# Altium PCB YarnControl_Mainboard_v1.0.PcbDoc
Units mm, origin at the board's own origin, x right, y up, seen from the top; angles counter-clockwise.
Board outline 100 x 100 mm, 2 copper layers (Top Layer, Bottom Layer); 119 components, 102 nets, 458 pads, 345 vias.
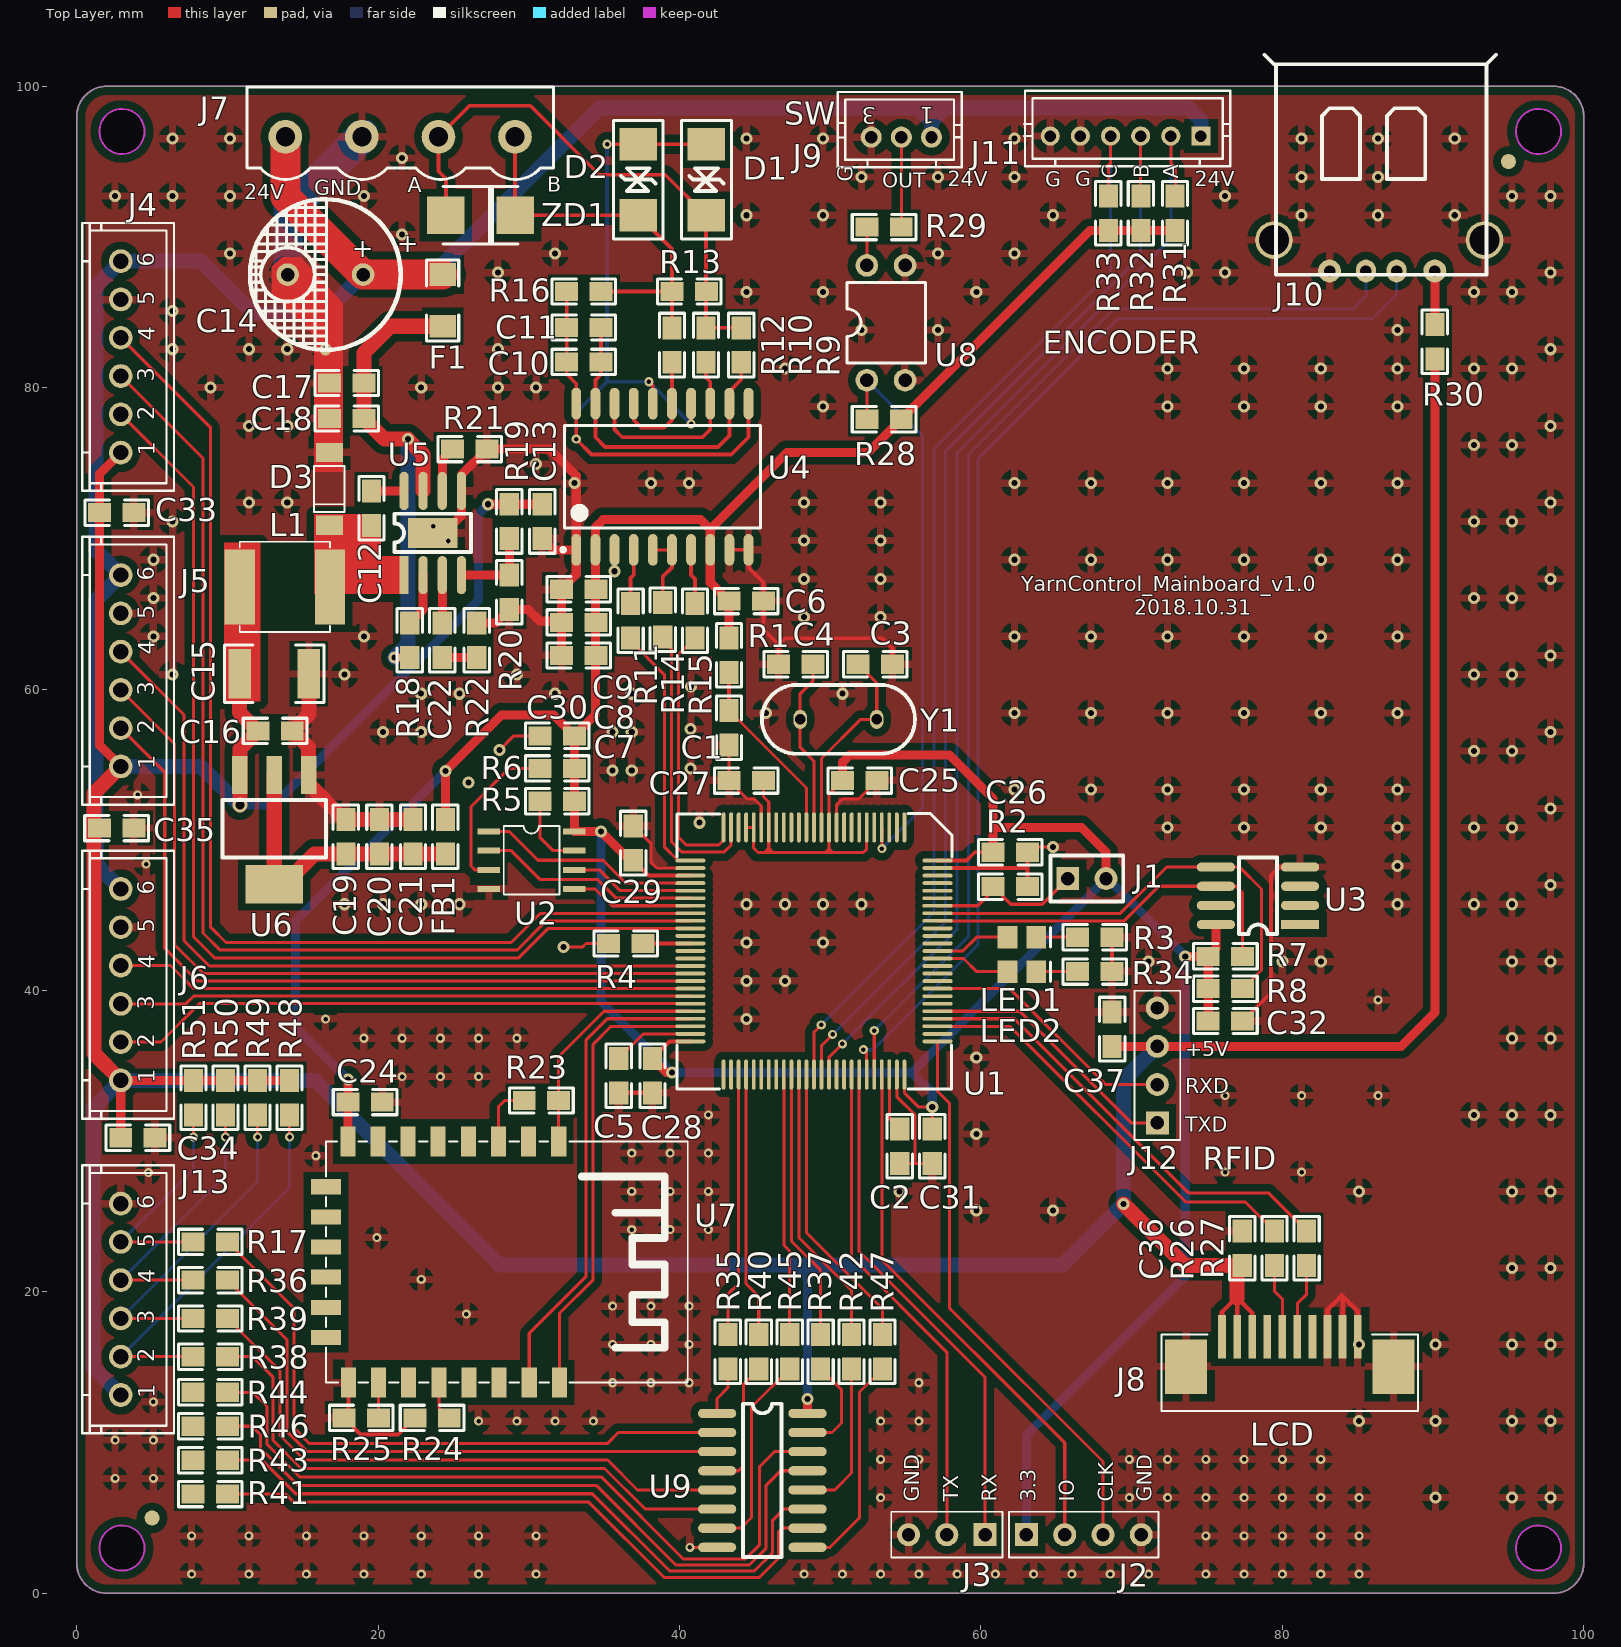
[diagram p0: Top Layer view]
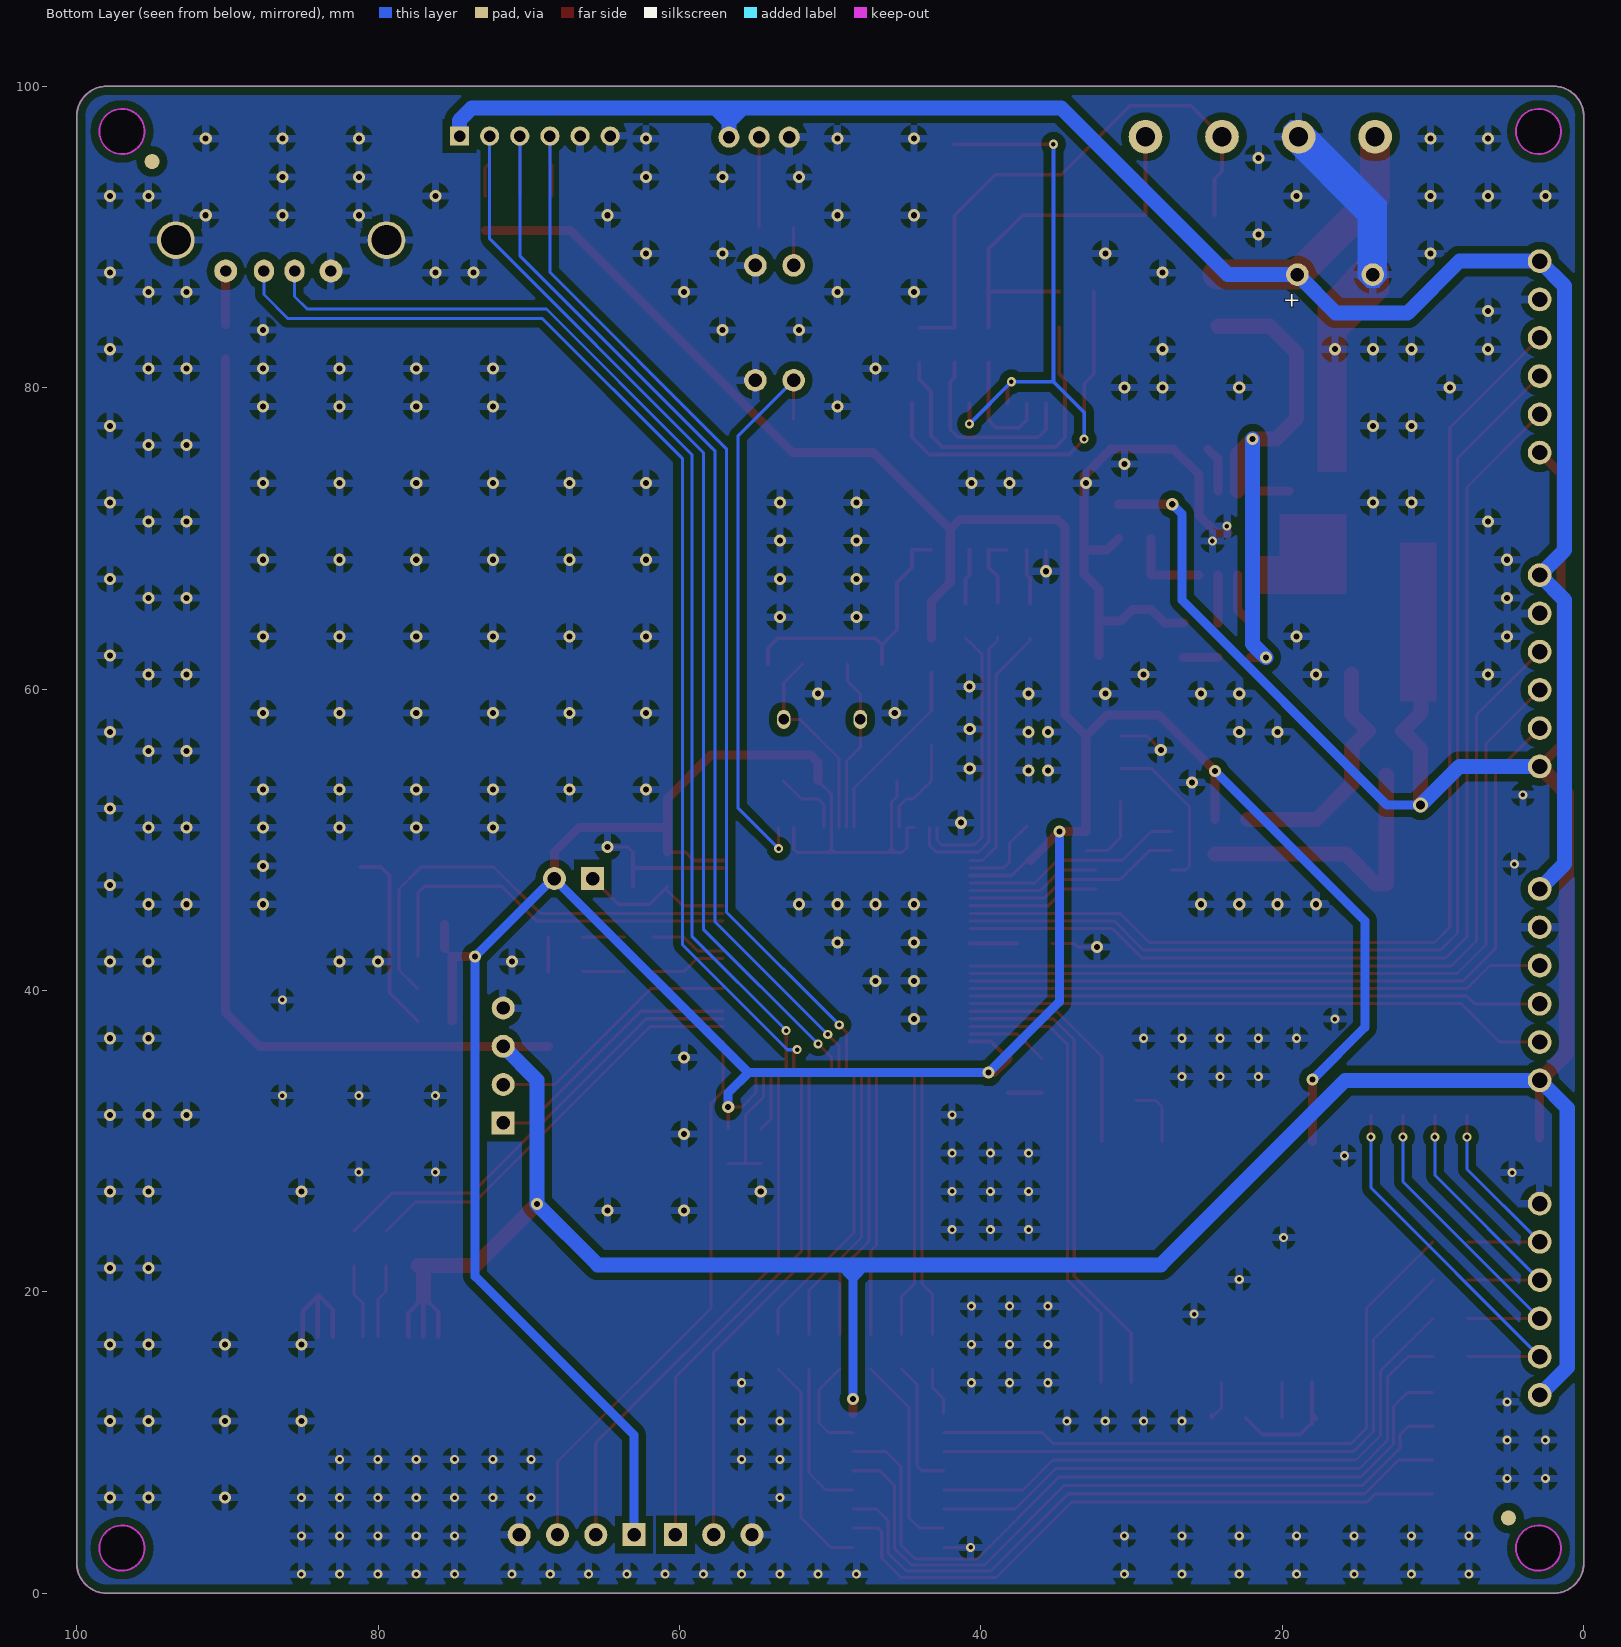
[diagram p1: Bottom Layer view, seen from below]

## Layer stack, top to bottom
Top Layer: signal copper 0.0356
Dielectric: dielectric 0.32, FR-4, Dk 4.8
Bottom Layer: signal copper 0.0356

## Board outline
0,2 0,98 cw(c2,98) 2,100 98,100 cw(c98,98) 100,98 100,2 cw(c98,2) 98,0 2,0 cw(c2,2)
cut-out: 3,1.5 cw(c3,3) 1.5,3 cw(c3,3) 3,4.5 cw(c3,3) 4.5,3 cw(c3,3)
cut-out: 95.5,3 ccw(c97,3) 97,1.5 ccw(c97,3) 98.5,3 ccw(c97,3) 97,4.5 ccw(c97,3)
cut-out: 97,95.5 cw(c97,97) 95.5,97 cw(c97,97) 97,98.5 cw(c97,97) 98.5,97 cw(c97,97)
cut-out: 3,95.5 cw(c3,97) 1.5,97 cw(c3,97) 3,98.5 cw(c3,97) 4.5,97 cw(c3,97)

## Design rules (kind name [scope] priority, off if disabled: settings)
Clearance Clearance_1 [inpoly] p1: gap=0.508
Clearance TQFP100 [(HasFootprint('TQFP100'))] p2: gap=0.178
Clearance [All] p3: gap=0.203
ComponentClearance [All] p1: gap=0 collisioncheckmode=3 verticalgap=0.254 showdistances=FALSE
HoleSize [All] p1: absolutevalues=TRUE maxlimit=4 minlimit=0.025 maxpercent=80.000 minpercent=20.000
MinimumSolderMaskSliver [All] p1: minsoldermaskwidth=0
PolygonConnect [All] p1: connectstyle=Relief reliefconductorwidth=0.508 reliefentries=4 polygonreliefangle="90 Angle"
RoutingVias [All] p1: holewidth=0.711 width=1.27 viastyle="Through Hole" minholewidth=0.3 minwidth=0.6 maxholewidth=0.711 maxwidth=1.27
SilkToSilkClearance [All] p1: silktosilkclearance=0
SilkscreenOverComponentPads [All] p1: minsilkscreentomaskgap=0
SolderMaskExpansion [All] p1: expansion=0.102
Width [All] p1: maxlimit=2 minlimit=0.203 preferedwidth=0.203
23 further rules are at their usual default settings.

## Classes and differential pairs
component class mainboard_interface.v1.0: J8 J9 J10 J11 J12 R26 R27 R28 R29 R30 R31 R32 R33 U8
component class mainboard_mcu.v1.0: C1 C2 C3 C4 C5 J1 J2 J3 LED1 LED2 R1 R2 R3 R4 R5 R6 R7 R8 R34 U1 U2 U3 Y1
component class mainboard_rs485.v1.0: C6 C7 C8 C9 C10 C11 C12 C13 C14 C15 C16 C17 C18 C19 C20 C21 C22 C25 C26 C27 C28 C29 C30 C31 C32 C33 C34 C35 C36 C37 D1 D2 D3 F1 FB1 J7 L1 R9 R10 R11 R12 R13 R14 R15 R16 R18 R19 R20 R21 R22 U4 U5 U6 ZD1
component class mainboard_wifi.v1.0: C24 R23 R24 R25 U7
component class mainboard_motor.v1.0: J4 J5 J6 J13 R17 R35 R36 R37 R38 R39 R40 R41 R42 R43 R44 R45 R46 R47 R48 R49 R50 R51 U9

## Components (designator, comment, footprint, x,y, rotation, side; value= is the part's Value field where it differs from the comment)
C1 "0.1uF" 0805#1 43.282,56.286 r90 top
C2 "2.2uF" 0805#1 54.61,28.524 r90 top
C3 "22p" 0805#1 51.841,61.646 r0 top
C4 "22p" 0805#1 48.844,61.646 r180 top
C5 "2.2uF" 0805#1 35.966,35.484 r270 top
C6 "106" 0805#1 45.568,65.837 r180 top
C7 "104" 0805#1 32.156,62.222 r0 top
C8 "104" 0805#1 32.156,64.423 r0 top
C9 "103" 0805#1 32.156,66.624 r0 top
C10 "106" 0805#1 32.512,81.712 r0 top
C11 "104" 0805#1 32.512,83.998 r0 top
C12 "0.1uF" 0805#1 19.558,73.152 r270 top
C13 "22uF" 0805#1 30.886,69.977 r90 top
C14 "220uF" CAP-5mm 18.999,87.503 r180 top
C15 "47uF" 1812 13.106,61.011 r180 top
C16 "0.1uF" 0805#1 14.3,57.226 r180 top
C17 "10uF" 0805#1 19.05,80.315 r180 top
C18 "0.1uF" 0805#1 19.05,77.953 r180 top
C19 "10uF" 0805#1 17.856,51.333 r270 top
C20 "0.1uF" 0805#1 20.083,51.333 r270 top
C21 "0.1uF" 0805#1 22.31,51.333 r270 top
C22 "150pF" 0805#1 24.257,64.389 r270 top
C24 "0.1uF" 0805#1 20.273,32.592 r180 top
C25 "0.1uF" 0805#1 53.111,53.924 r180 top
C26 "0.1uF" 0805#1 63.094,49.174 r180 top
C27 "0.1uF" 0805#1 43.282,53.924 r0 top
C28 "0.1uF" 0805#1 38.202,33.198 r90 top
C29 "0.1uF" 0805#1 36.932,50.927 r270 top
C30 "0.1uF" 0805#1 30.734,56.896 r0 top
C31 "0.1uF" 0805#1 56.769,28.524 r90 top
C32 "0.1uF" 0805#1 77.368,37.973 r180 top
C33 "0.1uF" 0805#1 3.81,71.704 r180 top
C34 "0.1uF" 0805#1 5.207,30.226 r180 top
C35 "0.1uF" 0805#1 3.785,50.775 r180 top
C36 "0.1uF" 0805#1 77.343,24.028 r270 top
C37 "0.1uF" 0805#1 68.707,38.583 r270 top
D1 "TVS" SMBJ_DO-214 41.783,93.802 r270 top
D2 "TVS" SMBJ_DO-214 37.262,93.802 r270 top
D3 "1N5819" Diode_TP2 16.764,75.692 r270 top
F1 "FUSE" 1206 24.282,87.503 r270 top
FB1 "FERRITE" 0805#1 24.46,49.047 r90 top
J1 "Jumper" J254-2 65.761,47.422 r0 top
J2 "SH-4" J254-4 63.017,3.886 r0 top
J3 "SH-3" J2.54-3 57.734,3.886 r180 top
J4 "STEP MOTOR1" XH2.54-6T 2.921,75.692 r90 top
J5 "STEP MOTOR2" XH2.54-6T 2.921,54.864 r90 top
J6 "STEP MOTOR3" XH2.54-6T 2.921,34.036 r90 top
J7 "SH-4" J5.08_4(NoEar) 21.463,96.647 r180 top
J8 "SDWe050C17" FCC1.0-10 80.493,16.027 r90 top
J9 "SH-3" PH2.0-3T 56.718,96.622 r180 top
J10 "USB" USB_FEMALE_A 86.36,94.996 r90 top
J11 "J-6" PH2.0-6P 74.6,96.698 r180 top
J12 "RFID" J254-4 71.704,31.217 r90 top
J13 "SERVO MOTOR" XH2.54-6T 2.921,13.157 r90 top
L1 "4.7uH" Inductance6*6 13.818,66.777 r180 top
LED1 "GREEN" LED 62.713,43.536 r0 top
LED2 "GREEN" LED 62.713,41.25 r0 top
R1 "10K" 0805#1 43.282,61.112 r90 top
R2 "10K" 0805#1 60.808,46.888 r0 top
R3 "1K" 0805#1 66.421,43.536 r0 top
R4 "10K" 0805#1 37.567,43.121 r180 top
R5 "10K" 0805#1 33.02,52.553 r180 top
R6 "10K" 0805#1 30.734,54.737 r0 top
R7 "22R" 0805#1 77.368,42.266 r180 top
R8 "22R" 0805#1 77.368,40.119 r180 top
R9 "47K" 0805#1 44.094,83.972 r270 top
R10 "101" 0805#1 41.758,81.686 r90 top
R11 "220" 0805#1 36.754,63.398 r90 top
R12 "101" 0805#1 39.497,81.686 r90 top
R13 "120R" 0805#1 39.497,86.385 r0 top
R14 "220" 0805#1 38.887,63.449 r90 top
R15 "220" 0805#1 41.021,63.398 r90 top
R16 "47K" 0805#1 32.512,86.385 r0 top
R17 "100R" 0805#2 8.865,23.317 r180 top
R18 "100K" 0805#1 22.098,64.389 r270 top
R19 "210K" 0805#1 28.702,72.263 r270 top
R20 "40.2K" 0805#1 28.702,65.278 r90 top
R21 "100K" 0805#1 27.229,75.921 r180 top
R22 "100K" 0805#1 26.543,64.389 r270 top
R23 "1K" 0805#1 31.982,32.694 r180 top
R24 "1K/NC" 0805#1 24.718,11.637 r180 top
R25 "1K" 0805#1 20.019,11.637 r180 top
R26 "220" 0805#1 79.477,21.742 r90 top
R27 "220" 0805#1 81.61,21.742 r90 top
R28 "10K" 0805#1 54.712,77.902 r180 top
R29 "1K" 0805#1 52.426,90.653 r0 top
R30 "0R" 0805#1 90.119,81.915 r90 top
R31 "10K" 0805#1 72.873,90.424 r90 top
R32 "10K" 0805#1 70.612,90.424 r90 top
R33 "10K" 0805#1 68.453,90.424 r90 top
R34 "1K" 0805#1 66.421,41.25 r0 top
R35 "100R" 0805#2 43.205,16.027 r90 top
R36 "100R" 0805#2 8.865,20.777 r180 top
R37 "100R" 0805#2 49.362,16.027 r270 top
R38 "100R" 0805#2 8.865,15.697 r180 top
R39 "100R" 0805#2 8.865,18.237 r180 top
R40 "100R" 0805#2 45.258,16.027 r90 top
R41 "100R" 0805#2 8.865,6.579 r180 top
R42 "100R" 0805#2 51.415,16.027 r270 top
R43 "100R" 0805#2 8.865,8.831 r180 top
R44 "100R" 0805#2 8.865,13.335 r180 top
R45 "100R" 0805#2 47.31,16.027 r90 top
R46 "100R" 0805#2 8.865,11.083 r180 top
R47 "100R" 0805#2 53.467,16.027 r270 top
R48 "10K" 0805#1 14.122,34.036 r270 top
R49 "10K" 0805#1 11.997,34.036 r270 top
R50 "10K" 0805#1 9.872,34.036 r270 top
R51 "10K" 0805#1 7.747,34.036 r270 top
U1 "STM32F40x" TQFP100 48.92,42.621 r270 top locked
U2 "W25X16" SOP8 30.175,48.641 r0 top
U3 "SMEC98SP" SO-8 78.384,46.279 r180 top
U4 "ADM2587E" SOIC_W_20 38.227,77.394 r90 top
U5 "MP1584" MP1584 23.622,70.358 r90 top
U6 "AMS1117" TO-223 13.106,50.673 r180 top
U7 "ESP-12F" ESP-12F 24.286,21.975 r270 top
U8 "TLP521-1" DIP-4 52.426,88.113 r90 top
U9 "AM26LS31" SO-16 42.494,11.938 r0 top
Y1 "8M" XTAL 48.006,57.988 r0 top
ZD1 "SMBJ15CA" DO-214AA/SMB 26.797,91.44 r0 top

## Footprints (in the part's own frame and the unit in brackets; to place one, negate y for a bottom-side part, rotate by r counter-clockwise, add the part's x,y. Pads: shape width x height; smd on the part's side, far side on the other; paste and mask are expansions set on the pad)
0805#1 [mil]
  rect 60x50 smd: 1(0,0) 2(90,0)
  silkscreen extent -38,-33 128,33
0805#2 [mil]
  rect 60x50 smd: 1(-45,0) 2(45,0)
  silkscreen extent -83,-33 83,33, body extent -39,-25 39,24, height 18
1206 [mil]
  rect 60x70 smd: 1(0,0) 2(135,0)
  silkscreen extent -38,-42 173,42
1812 [mm]
  rect 1.5x3.3 smd: 1(-2.3,0) 2(2.3,0)
  silkscreen extent -3.3,-1.91 3.3,1.91
CAP-5mm [mm]
  round 1.5 hole 0.9: 1(0,0) 2(5,0)
  silkscreen extent -2.5,-5 7.5,5
Diode_TP2 [mil]
  rect 50x70 smd: 1(0,0) 2(190,0)
  silkscreen extent 35,-40 155,40
DIP-4 [mm]
  round 1.5 hole 0.9: 1(0,0) 2(0,-2.54) 3(-7.62,-2.54) 4(-7.62,0)
  silkscreen extent -6.48,-3.9 -1.14,1.3
DO-214AA/SMB [mm]
  rect 2.5x2.5 smd: 1(-2.3,0) 2(2.3,0)
  silkscreen extent -2.5,-1.9 2.5,1.9
ESP-12F [mm]
  rect 2x1 smd: 1(-8,7.7) 2(-8,5.7) 3(-8,3.7) 4(-8,1.7) 5(-8,-0.3) 6(-8,-2.3) 7(-8,-4.3) 8(-8,-6.3) 15(8,-6.26) 16(8,-4.26) 17(8,-2.26) 18(8,-0.26) 19(8,1.74) 20(8,3.74) 21(8,5.74) 22(8,7.74)
  rect 1x2 smd: 9(-5,-7.74) 10(-3,-7.74) 11(-1,-7.74) 12(1,-7.74) 13(3,-7.74) 14(5,-7.74)
  silkscreen extent -8,-7.74 8,16.26
FCC1.0-10 [mil]
  rect 114x20 smd: 1(39,177) 2(39,137.63) 3(39,98.26) 4(39,58.89) 5(39,19.52) 6(39,-19.85) 7(39,-59.22) 8(39,-98.59) 9(39,-137.96) 10(39,-177.33)
  rect 142x110 smd: 11(-39,271) 12(-39,-271)
  silkscreen extent -155,-335 45,335
Inductance6*6 [mm]
  rect 2x5 smd: 1(-3,0) 2(3,0)
  silkscreen extent -3,-3 3,3
J2.54-3 [mil]
  rect 60x60 hole 35: 1(-100,0)
  round 60 hole 35: 2(0,0) 3(100,0)
  silkscreen extent -145,-60 145,60
J5.08_4(NoEar) [mil]
  round 88 hole 50: 1(300,0) 2(100,0) 3(-100,0) 4(-300,0)
  silkscreen extent -400,-130 400,111
J254-2 [mil]
  rect 60x60 hole 35: 1(0,0)
  round 60 hole 35: 2(100,0)
  silkscreen extent -45,-60 145,60
J254-4 [mil]
  rect 60x60 hole 35: 1(0,0)
  round 60 hole 35: 2(100,0) 3(200,0) 4(300,0)
  silkscreen extent -45,-60 345,60
LED [mm]
  rect 1.3x1.5 smd: 1(-0.95,0) 2(0.95,0)
  silkscreen extent 1.9,-0.65 1.9,0.65
MP1584 [mil]
  rect 78.74x129.92 smd: 0(0,0)
  rect 100x24 smd: 1(-110,75)
  oval 100x24 smd: 2(-110,25) 3(-110,-25) 4(-110,-75) 5(110,-75) 6(110,-25) 7(110,25) 8(110,75)
  silkscreen extent -50,-100 50,100
PH2.0-3T [mil]
  round 55 hole 32: 1(0,0)
  round 55 hole 32.01: 2(78.74,0) 3(157.48,0)
  silkscreen extent -79,-118 245,79
PH2.0-6P [mil]
  rect 50x50 hole 30: 1(0,0)
  round 50 hole 30: 2(78.74,0) 3(157.48,0) 4(236.22,0) 5(314.96,0) 6(393.7,0)
  silkscreen extent -77,-118 462,79
SMBJ_DO-214 [mm]
  rect 2.16x2.5 smd: 1(-2.35,0) 2(2.35,0)
  silkscreen extent -3.94,-1.65 3.94,1.65, body extent -2.8,-1.95 2.8,1.95, height 2.5
SO-8 [mil]
  rect 100x24 smd: 1(-110,75)
  oval 100x24 smd: 2(-110,25) 3(-110,-25) 4(-110,-75) 5(110,-75) 6(110,-25) 7(110,25) 8(110,75)
  silkscreen extent -50,-100 50,100
SO-16 [mil]
  oval 100x24 smd: 1(0,0) 2(0,-50) 3(0,-100) 4(0,-150) 5(0,-200) 6(0,-250) 7(0,-300) 8(0,-350) 9(236,-350) 10(236,-300) 11(236,-250) 12(236,-200) 13(236,-150) 14(236,-100) 15(236,-50) 16(236,0)
  silkscreen extent 68,-375 168,25
SOIC_W_20 [mm]
  oval 2.1x0.65 smd: 1(-8.152,5.08) 2(-8.152,3.81) 3(-8.152,2.54) 4(-8.152,1.27) 5(-8.152,0) 6(-8.152,-1.27) 7(-8.152,-2.54) 8(-8.152,-3.81) 9(-8.152,-5.08) 10(-8.152,-6.35) 11(1.548,-6.35) 12(1.548,-5.08) 13(1.548,-3.81) 14(1.548,-2.54) 15(1.548,-1.27) 16(1.548,0) 17(1.548,1.27) 18(1.548,2.54) 19(1.548,3.81) 20(1.548,5.08)
  silkscreen extent -8.28,-7.13 0.1,6.08, body extent -8.46,-7.13 1.86,5.86, height 2.5
SOP8 [mm]
  rect 1.5x0.4 smd: 1(-2.829,1.905) 2(-2.829,0.635) 3(-2.829,-0.635) 4(-2.829,-1.905) 5(2.829,-1.905) 6(2.829,-0.635) 7(2.829,0.635) 8(2.829,1.905)
  silkscreen extent -1.84,-2.29 1.87,2.29
TO-223 [mil]
  rect 150x100 smd: 0(0,142.5)
  rect 40x100 smd: 1(-90,-142.5) 2(0,-142.5) 3(90,-142.5)
  silkscreen extent -135,-78 135,73
TQFP100 [mm]
  round 1 on Top Overlay: 0(-7.62,7.62)
  oval 2x0.254 smd: 1(-8.2,6) 2(-8.2,5.5) 3(-8.2,5) 4(-8.2,4.5) 5(-8.2,4) 6(-8.2,3.5) 7(-8.2,3) 8(-8.2,2.5) 9(-8.2,2) 10(-8.2,1.5) 11(-8.2,1) 12(-8.2,0.5) 13(-8.2,0) 14(-8.2,-0.5) 15(-8.2,-1) 16(-8.2,-1.5) 17(-8.2,-2) 18(-8.2,-2.5) 19(-8.2,-3) 20(-8.2,-3.5) 21(-8.2,-4) 22(-8.2,-4.5) 23(-8.2,-5) 24(-8.2,-5.5) 25(-8.2,-6) 51(8.2,-6) 52(8.2,-5.5) 53(8.2,-5) 54(8.2,-4.5) 55(8.2,-4) 56(8.2,-3.5) 57(8.2,-3) 58(8.2,-2.5) 59(8.2,-2) 60(8.2,-1.5) 61(8.2,-1) 62(8.2,-0.5) 63(8.2,0) 64(8.2,0.5) 65(8.2,1) 66(8.2,1.5) 67(8.2,2) 68(8.2,2.5) 69(8.2,3) 70(8.2,3.5) 71(8.2,4) 72(8.2,4.5) 73(8.2,5) 74(8.2,5.5) 75(8.2,6)
  oval 0.254x2 smd: 26(-6,-8.2) 27(-5.5,-8.2) 28(-5,-8.2) 29(-4.5,-8.2) 30(-4,-8.2) 31(-3.5,-8.2) 32(-3,-8.2) 33(-2.5,-8.2) 34(-2,-8.2) 35(-1.5,-8.2) 36(-1,-8.2) 37(-0.5,-8.2) 38(0,-8.2) 39(0.5,-8.2) 40(1,-8.2) 41(1.5,-8.2) 42(2,-8.2) 43(2.5,-8.2) 44(3,-8.2) 45(3.5,-8.2) 46(4,-8.2) 47(4.5,-8.2) 48(5,-8.2) 49(5.5,-8.2) 50(6,-8.2) 76(6,8.2) 77(5.5,8.2) 78(5,8.2) 79(4.5,8.2) 80(4,8.2) 81(3.5,8.2) 82(3,8.2) 83(2.5,8.2) 84(2,8.2) 85(1.5,8.2) 86(1,8.2) 87(0.5,8.2) 88(0,8.2) 89(-0.5,8.2) 90(-1,8.2) 91(-1.5,8.2) 92(-2,8.2) 93(-2.5,8.2) 94(-3,8.2) 95(-3.5,8.2) 96(-4,8.2) 97(-4.5,8.2) 98(-5,8.2) 99(-5.5,8.2) 100(-6,8.2)
  silkscreen extent -9.12,-9.1 9.17,9.14
USB_FEMALE_A [mil]
  round 60 hole 30: 1(-285.63,-147.91) 4(-285.63,127.09)
  oval 60x52.13 hole 30: 2(-285.63,-47.91) 3(-285.63,32.09)
  round 98.43 hole 78.74: 5(-205,272.09) 6(-205,-277.91)
  silkscreen extent -296,-308 279,297
XH2.54-6T [mil]
  round 62 hole 40: 1(0,0) 2(100,0) 3(200,0) 4(300,0) 5(400,0) 6(500,0)
  silkscreen extent -100,-139 600,101
XTAL [mil]
  oval 35x50 hole 28: 1(0,0) 2(200,0)
  silkscreen extent -100,-90 300,90

## Part data
C1 C2 C3 C4 C5 C6 C7 C8 C9 C10 C11 C24: library part Cap, "Capacitor"
C12 C13 C17 C18 C22: library part CAP, "电容"
C14: library part "Cap Pol1", "电解电容"
C15 C16 C19 C20 C21 C25 C26 C27 C28 C29 C30 C31 C32 C33 C34 C35 C36 C37: library part Cap0805
D3: library part Diode, "二极管"
F1: "保险丝"
J4 J5 J6 J11 J13: library part SH-6
J8: library part SH-12
J12: library part SH-4
L1: library part Inductor, "电感"
LED1 LED2: library part LED2, "Typical RED, GREEN, YELLOW, AMBER GaAs LED"
R1 R4 R5 R6 R7 R8 R9 R10 R11 R12 R13 R14 R15 R16 R17 R23 R24 R25 R26 R27 R28 R29 R30 R31 R32 R33 R35 R36 R37 R38 R39 R40 R41 R42 R43 R44 R45 R46 R47 R48 R49 R50 R51: library part Res2, "Resistor"
R2 R3 R18 R19 R20 R21 R22 R34: library part RES, "电阻"
U4: "isolated DC-DC RS485"
Y1: library part X-32.768, "Crystal Oscillator"
ZD1: library part TVS, "瞬态抑制二极管"

## Free pads (board coordinates)
  round 1 smd: 0(5,5) 0(95,95)
  round 1 smd far side: 0(5,5) 0(95,95)

## Via types
v1: diameter 0.8, hole 0.4, Top Layer to Bottom Layer, 224 vias
v2: diameter 0.6, hole 0.3, Top Layer to Bottom Layer, 120 vias
v3: diameter 1, hole 0.6, Top Layer to Bottom Layer, 1 vias

## Nets (pads, with @x,y where several pads share a name; then routed paths per layer and width w, separated by ;. In a path a pad name is that pad's centre, name@x,y a point inside that pad or via, vN(x,y) a via of type N, cw(c..) or ccw(c..) an arc to the next point about the centre after c; other vN are vias at no path point)
485_DE: R14.1 U1.24 | length 19.4
  Top Layer w0.203: R14.1 38.887,63.221 39.472,62.636 39.472,49.86 40.132,49.2 42.977,49.2 43.42,49.643 U1.24
485_RX: R11.1 U1.26 | length 16.9
  Top Layer w0.203: R11.1 36.754,63.195 38.989,60.96 38.989,49.53 39.898,48.621 U1.26
485_TX: R15.1 U1.25 | length 17.9
  Top Layer w0.203: R15.1 39.929,62.306 39.929,50.165 40.437,49.657 42.596,49.657 42.92,49.982 U1.25
+3.3V: C6.2 C7.2 C8.2 C9.2 C24.2 C25.2 C26.2 C27.2 C28.2 C29.2 C30.2 C31.2 C32.2 FB1.2 J1.2 J2.1 R1.2 R5.1 R6.2 R7.2 R8.2 R28.1 R31.1 R32.1 R33.1 U1.6 U1.11 U1.19 U1.21 U1.22 U1.28 U1.50 U1.75 U1.100 U2.8 U3.8 U4.2 U4.8 U7.8 | length 304.5
  Top Layer w0.203: U1.22 U1.21 44.92,49.441 45.212,49.149 45.644,49.149 ; C27.2 45.568,52.857 45.92,52.505 U1.19 45.92,49.428 ; C25.2 49.92,53.019 U1.11 49.92,49.403 ; U1.6 52.42,49.372 52.197,49.149 50.174,49.149 ; U1.75@54.92,33.599 U1.75 54.92,33.218 55.88,32.258 v1(56.769,32.258) C31.2 ; 45.644,49.149 45.923,49.149 ; 45.644,49.149 45.644,49.152 45.92,49.428 ; 45.92,49.428 45.92,49.152 45.923,49.149 ; 45.92,49.428 46.2,49.149 ; 45.923,49.149 46.2,49.149 ; 46.2,49.149 49.666,49.149 ; 49.666,49.149 49.936,49.149 ; 49.666,49.149 49.92,49.403 ; 49.92,49.403 49.92,49.165 49.936,49.149 ; 49.92,49.403 50.174,49.149 ; 49.936,49.149 50.174,49.149
  Top Layer w0.254: C29.2 37.951,47.621 U1.28 ; C28.2 39.339,36.621 U1.50 ; U1.100 59.035,48.621 59.588,49.174 C26.2 ; R7.2 R7.2@75.59,42.774
  Top Layer w0.6: U7.8@17.987,29.976 C24.2 v1(17.987,34.091) ; FB1.2 v1(24.46,54.559) 28.194,58.293 31.623,58.293 C30.2 ; C29.2@36.703,48.641 v1(34.798,50.546) 33.036,50.546 33.02,50.562 R5.1 R6.2 C30.2 ; C28.2 39.141,34.544 v1(39.497,34.544) ; R1.2 C6.2 42.037,67.081 U4.8 42.037,70.612 ; C25.2 50.825,55.143 51.308,55.626 57.912,55.626 60.808,52.73 60.808,50.8 ; C26.2 60.808,50.8 ; J1.2 68.301,49.174 66.675,50.8 60.808,50.8 ; R31.1 R32.1 R33.1 67.234,90.424 R28.1 52.502,75.692 47.117,75.692 42.037,70.612 ; v1(73.558,42.266) R7.2 R8.2 C32.2 ; R7.2@75.59,42.774 U3.8 ; C30.2 34.417,58.293 U4.2 34.417,70.739 34.925,71.247 41.402,71.247 42.037,70.612
  Bottom Layer w0.6: v1(17.987,34.091) 14.519,37.559 14.519,44.618 v1(24.46,54.559) ; v1(34.798,50.546) 34.798,39.243 v1(39.497,34.544) 55.423,34.544 ; v1(56.769,32.258) 56.769,33.198 55.423,34.544 ; J2.1 63.017,10.49 73.558,21.031 v1(73.558,42.266) J1.2@68.402,47.422 ; J1.2 55.423,34.544
+5V: C13.2 C15.2 C16.2 C33.2 C34.2 C35.2 C36.2 C37.2 J4.1 J5.1 J6.1 J8.1 J8.2 J8.3 J12.3 J13.1 L1.2 R19.1 R30.1 R48.1 R49.1 R50.1 R51.1 U6.3 U9.16 | length 321
  Top Layer w0.254: C15.2@10.818,61.011 L1.2
  Top Layer w0.3: J8.1 75.997,18.669 76.962,19.634 ; J8.2 76.997,19.599 77.997,18.599 J8.3
  Top Layer w0.6: C34.2 J6.1 R48.1 ; J5.1 1.524,56.261 C33.2 1.524,74.295 J4.1 ; v1(27.305,72.263) R19.1 C13.2 ; U9.16 v1(48.489,12.878) ; C37.2 J12.3 87.884,36.297 90.119,38.532 R30.1
  Top Layer w1: J6.1 1.143,35.814 1.143,53.086 J5.1 ; C15.2 10.806,58.434 C16.2 10.82,56.032 U6.3 v3(10.82,52.299) ; v1(69.469,25.832) 73.558,21.742 C36.2 76.997,21.396 76.997,19.599
  Bottom Layer w0.6: v3(10.82,52.299) 13.056,52.299 26.67,65.913 26.67,71.628 v1(27.305,72.263) ; 47.6,21.793 48.489,20.904 ; v1(48.489,12.878) 48.489,20.904 ; 48.489,21.793 48.489,20.904 ; 49.378,21.793 48.489,20.904
  Bottom Layer w1: J13.1 1.092,14.986 1.092,32.207 J6.1 15.824,34.036 28.067,21.793 47.6,21.793 48.489,21.793 49.378,21.793 65.43,21.793 v1(69.469,25.832) 69.469,34.061 J12.3 ; J5.1 8.255,54.864 v3(10.82,52.299)
+24V: C14.1 F1.1 J4.6 J5.6 J6.6 J7.1 J9.1 J11.1 | length 145.6
  Top Layer w2: J7.1 13.843,92.659 C14.1 F1.1
  Bottom Layer w1: J6.6 1.27,48.387 1.27,65.913 J5.6 1.27,69.215 1.27,86.741 J4.6 8.255,88.392 11.684,84.963 16.459,84.963 C14.1 23.622,87.503 34.671,98.552 55.829,98.552 ; J9.1 56.718,97.663 ; J11.1 74.6,97.739 73.787,98.552 57.607,98.552 ; 55.829,98.552 56.896,98.552 ; 55.829,98.552 56.718,97.663 ; 56.718,97.663 56.718,98.374 56.896,98.552 ; 56.718,97.663 57.607,98.552 ; 56.896,98.552 57.607,98.552
BOOT0: J1.1 R2.1 U1.94 | length 10.2
  Top Layer w0.203: U1.94 59.794,45.621 R2.1@60.808,46.634 ; R2.1 61.976,45.72 64.059,45.72 J1.1
BOOT1: R4.1 U1.37 | length 3.2
  Top Layer w0.254: R4.1 U1.37
CLOSE_SW: R28.2 U1.4 U8.4 | length 37.8
  Top Layer w0.203: R28.2 U8.4 ; v2(53.42,49.407) U1.4
  Bottom Layer w0.203: U8.4 56.134,76.784 56.134,52.121 v2(53.42,49.407)
DIFF_G: R40.2 U1.54 | length 17.6
  Top Layer w0.203: U1.54 44.42,20.527 45.258,19.69 R40.2
DIFF_G\: R42.1 U1.61 | length 18.7
  Top Layer w0.203: U1.61 47.92,23.606 51.415,20.112 R42.1
DIFF_IN1: R35.2 U1.53 | length 17.5
  Top Layer w0.203: R35.2 43.205,19.837 43.92,20.552 U1.53
DIFF_IN2: R45.2 U1.59 | length 17.4
  Top Layer w0.203: U1.59 46.92,23.107 47.31,22.718 R45.2
DIFF_IN3: R47.1 U1.62 | length 19.3
  Top Layer w0.203: U1.62 48.42,23.919 53.467,18.872 R47.1
DIFF_IN4: R37.1 U1.60 | length 18.1
  Top Layer w0.203: U1.60 47.42,23.369 49.362,21.427 R37.1
DIFF_OUTPUT1+: R17.1 U9.2 | length 43
  Top Layer w0.203: R17.1 14.427,18.898 14.427,10.947 15.443,9.931 35.204,9.931 35.941,10.668 U9.2
DIFF_OUTPUT1-: R36.1 U9.3 | length 40.8
  Top Layer w0.203: R36.1 13.945,16.84 13.945,10.744 15.291,9.398 U9.3
DIFF_OUTPUT2+: R38.1 U9.6 | length 39.1
  Top Layer w0.203: R38.1 11.659,15.697 13.03,14.326 13.03,10.135 14.884,8.28 35.027,8.28 37.719,5.588 U9.6
DIFF_OUTPUT2-: R39.1 U9.5 | length 39.7
  Top Layer w0.203: R39.1 13.487,14.757 13.487,10.465 15.113,8.839 35.23,8.839 37.211,6.858 U9.5
DIFF_OUTPUT3+: R41.1 U9.10 | length 43.2
  Top Layer w0.203: R41.1 13.868,6.579 14.402,6.045 33.985,6.045 38.989,1.041 45.288,1.041 46.584,2.337 46.584,4.089 46.812,4.318 U9.10
DIFF_OUTPUT3-: R43.1 U9.11 | length 44.5
  Top Layer w0.203: R43.1 12.302,8.831 14.529,6.604 34.214,6.604 39.345,1.473 44.958,1.473 46.177,2.692 46.177,4.851 46.914,5.588 U9.11
DIFF_OUTPUT4+: R44.1 U9.14 | length 50.5
  Top Layer w0.203: R44.1 11.684,13.335 12.624,12.395 12.624,9.881 14.783,7.722 34.798,7.722 40.234,2.286 44.374,2.286 45.314,3.226 45.314,8.407 46.304,9.398 U9.14
DIFF_OUTPUT4-: R46.1 U9.13 | length 47.8
  Top Layer w0.203: R46.1 11.625,11.083 12.192,10.516 12.192,9.627 14.656,7.163 34.468,7.163 39.751,1.88 44.628,1.88 45.745,2.997 45.745,7.163 46.711,8.128 U9.13
ENCODER_A: J11.2 R31.2 U1.65 | length 75.8
  Top Layer w0.203: U1.65 49.92,35.569 v2(50.8,36.449) ; J11.2 72.6,94.913 72.898,94.615 72.898,92.735 R31.2
  Bottom Layer w0.203: v2(50.8,36.449) 58.42,44.069 58.42,75.692 72.6,89.872 J11.2
ENCODER_B: J11.3 R32.2 U1.64 | length 75
  Top Layer w0.203: U1.64 49.42,36.339 v2(50.165,37.084) ; J11.3 70.6,92.722 R32.2
  Bottom Layer w0.203: v2(50.165,37.084) 57.658,44.577 57.658,75.819 70.6,88.761 J11.3
ENCODER_C: J11.4 R33.2 U1.63 | length 74.5
  Top Layer w0.203: U1.63 48.92,37.236 v2(49.403,37.719) ; R33.2 68.453,94.742 68.6,94.889 J11.4
  Bottom Layer w0.203: v2(49.403,37.719) 56.896,45.212 56.896,75.946 68.6,87.65 J11.4
FLASH_SPI_MISO: U1.31 U2.2 | length 14.7
  Top Layer w0.203: U2.2 28.829,49.276 30.734,47.371 34.544,47.371 35.794,46.121 U1.31
FLASH_SPI_MOSI: U1.32 U2.5 | length 8.8
  Top Layer w0.203: U2.5@32.369,46.736 U2.5 34.417,46.736 35.532,45.621 U1.32
FLASH_SPI_NSS: U1.29 U2.1 | length 14.8
  Top Layer w0.203: U2.1 28.702,50.546 30.607,48.641 34.925,48.641 36.445,47.121 U1.29
FLASH_SPI_SCK: U1.30 U2.6 | length 8.9
  Top Layer w0.203: U2.6@32.369,48.006 U2.6 34.671,48.006 36.056,46.621 U1.30
GND: C1.1 C2.1 C3.2 C4.2 C5.2 C6.1 C7.1 C8.1 C9.1 C13.1 C14.2 C15.1 C16.1 C17.2 C18.2 C19.1 C20.1 C21.1 C24.1 C25.1 C26.1 C27.1 C28.1 C29.1 C30.1 C31.1 C32.1 C33.1 C34.1 C35.1 C36.1 C37.1 D3.1 J2.4 J3.3 J4.5 J5.5 J6.5 J7.2 J8.8 J8.9 J8.10 J8.11 J8.12 J9.3 J10.4 J10.5 J10.6 J11.5 J11.6 J12.4 J13.6 R2.2 R3.2 R4.2 R20.1 R21.1 R22.1 R24.2 R25.2 R34.2 U1.10 U1.20 U1.27 U1.74 U1.99 U2.4 U3.4 U4.1 U4.3 U4.9 U4.10 U5.0 U5.5 U6.1 U7.15 U8.2 U8.3 U9.8 | length 174.5
  Top Layer w0.203: v1(28.067,55.956) 29.007,56.896 C30.1 ; v1(32.309,42.875) 33.553,42.875 33.799,43.121 R4.2 ; v1(35.687,67.818) U4.3 ; C29.1 38.1,49.759 38.1,48.514 38.493,48.121 U1.27 ; v2(40.691,3.048) U9.8 ; C1.1 C27.1 44.501,52.705 44.958,52.705 45.42,52.243 U1.20 ; U1.10 50.42,52.325 50.8,52.705 51.892,52.705 C25.1 ; U1.74 54.42,32.956 55.626,31.75 55.626,28.524 ; C2.1 55.626,28.524 ; C31.1 55.626,28.524 ; C26.1 63.449,49.53 v1(64.77,49.53)
  Top Layer w0.254: C14.2 16.764,84.738 C17.2 C18.2 D3.1 ; R25.2@18.026,11.219 R25.2@18.026,11.344 ; U7.15 R25.2@18.026,11.93 ; C21.1 C21.1@22.377,51.333 ; R24.2 21.336,10.541 18.829,10.541 R25.2@18.026,11.344 ; U4.9 U4.10 44.577,68.072 45.568,67.081 C6.1 45.568,63.932 46.558,62.941 ; C4.2 46.558,62.941 ; C3.2 54.127,62.713 53.467,63.373 46.99,63.373 46.558,62.941 ; U1.99 63.094,48.121 ; R2.2 63.094,48.121 ; C26.1 63.094,48.121 ; R34.2 R3.2 ; C32.1 79.248,39.853 79.248,47.625 79.807,48.184 U3.4 ; R25.2@18.026,11.344 R25.2 R25.2@18.026,11.93 ; R25.2@18.026,11.344 R25.2@18.026,11.93
  Top Layer w0.3: C5.2 C28.1 ; J8.8 82.997,18.811 83.947,19.761 ; J8.9 83.997,19.711 84.997,18.711 J8.10
  Top Layer w0.6: U5.0 24.384,70.358 25.527,71.501 U5.5 25.527,74.219 R21.1 31.394,75.921 33.147,74.168 U4.1 ; R22.1 27.813,64.389 R20.1 29.972,65.278 30.734,64.516 32.063,64.516 C8.1 ; C13.1 31.622,69.242 U4.1 ; C7.1 C8.1 ; C8.1 C9.1 33.147,67.615 U4.1
  Top Layer w1: C15.1 15.406,58.332 C16.1 15.392,56.134 U6.1 15.392,53.696 17.755,51.333 C19.1 C20.1 C21.1
  Bottom Layer w0.254: C14.2 13.999,91.723 J7.2
  other v1: 90.17,6.35 95.25,6.35 97.79,6.35 85.09,11.43 90.17,11.43 95.25,11.43 97.79,11.43 85.09,16.51 90.17,16.51 95.25,16.51 97.79,16.51 95.25,21.59 97.79,21.59 59.69,25.4 64.77,25.4 54.61,26.67 85.09,26.67 95.25,26.67 97.79,26.67 59.69,30.48 92.71,31.75 95.25,31.75 97.79,31.75 59.69,35.56 95.25,36.83 97.79,36.83 44.45,38.1 44.45,40.64 46.99,40.64 71.12,41.91 80.01,41.91 82.55,41.91 95.25,41.91 97.79,41.91 44.45,43.18 49.53,43.18 17.78,45.72 20.32,45.72 22.86,45.72 25.4,45.72 44.45,45.72 46.99,45.72 49.53,45.72 52.07,45.72 87.63,45.72 92.71,45.72 95.25,45.72 97.79,46.99 87.63,48.26 72.39,50.8 77.47,50.8 82.55,50.8 87.63,50.8 92.71,50.8 95.25,50.8 41.326,51.13 97.79,52.07 62.23,53.34 67.31,53.34 72.39,53.34 77.47,53.34 82.55,53.34 87.63,53.34 25.984,53.797 35.56,54.61 36.83,54.61 40.742,54.737 92.71,55.88 95.25,55.88 20.32,57.15 22.86,57.15 35.56,57.15 36.83,57.15 97.79,57.15 40.742,57.353 45.72,58.42 62.23,58.42 67.31,58.42 72.39,58.42 77.47,58.42 82.55,58.42 87.63,58.42 22.86,59.69 25.4,59.69 31.75,59.69 36.83,59.69 50.8,59.69 40.767,60.173 6.35,60.96 17.78,60.96 29.21,60.96 92.71,60.96 95.25,60.96 97.79,62.23 5.08,63.5 19.05,63.5 62.23,63.5 67.31,63.5 72.39,63.5 77.47,63.5 82.55,63.5 87.63,63.5 48.26,64.77 53.34,64.77 5.08,66.04 92.71,66.04 95.25,66.04 48.26,67.31 53.34,67.31 97.79,67.31 5.08,68.58 62.23,68.58 67.31,68.58 72.39,68.58 77.47,68.58 82.55,68.58 87.63,68.58 48.26,69.85 53.34,69.85 6.35,71.12 92.71,71.12 95.25,71.12 11.43,72.39 13.97,72.39 48.26,72.39 53.34,72.39 97.79,72.39 33.02,73.66 38.1,73.66 40.64,73.66 62.23,73.66 67.31,73.66 72.39,73.66 77.47,73.66 82.55,73.66 87.63,73.66 30.48,74.93 92.71,76.2 95.25,76.2 11.43,77.47 13.97,77.47 97.79,77.47 49.53,78.74 72.39,78.74 77.47,78.74 82.55,78.74 87.63,78.74 8.89,80.01 22.86,80.01 27.94,80.01 30.48,80.01 46.99,81.28 72.39,81.28 77.47,81.28 82.55,81.28 87.63,81.28 92.71,81.28 95.25,81.28 6.35,82.55 11.43,82.55 13.97,82.55 16.51,82.55 27.94,82.55 97.79,82.55 52.07,83.82 57.15,83.82 87.63,83.82 6.35,85.09 44.45,86.36 49.53,86.36 59.69,86.36 92.71,86.36 95.25,86.36 27.94,87.63 73.66,87.63 76.2,87.63 97.79,87.63 10.16,88.9 31.75,88.9 57.15,88.9 62.23,88.9 21.59,90.17 44.45,91.44 49.53,91.44 64.77,91.44 81.28,91.44 86.36,91.44 91.44,91.44 2.54,92.71 6.35,92.71 10.16,92.71 19.05,92.71 76.2,92.71 95.25,92.71 97.79,92.71 52.07,93.98 57.15,93.98 62.23,93.98 81.28,93.98 86.36,93.98 21.59,95.25 6.35,96.52 10.16,96.52 44.45,96.52 49.53,96.52 62.23,96.52 81.28,96.52 86.36,96.52 91.44,96.52
  other v2: 7.62,1.27 11.43,1.27 15.24,1.27 19.05,1.27 22.86,1.27 26.67,1.27 30.48,1.27 48.26,1.27 50.8,1.27 53.34,1.27 55.88,1.27 58.42,1.27 60.96,1.27 63.5,1.27 66.04,1.27 68.58,1.27 71.12,1.27 74.93,1.27 77.47,1.27 80.01,1.27 82.55,1.27 85.09,1.27 7.62,3.81 11.43,3.81 15.24,3.81 19.05,3.81 22.86,3.81 26.67,3.81 30.48,3.81 74.93,3.81 77.47,3.81 80.01,3.81 82.55,3.81 85.09,3.81 53.34,6.35 69.85,6.35 72.39,6.35 74.93,6.35 77.47,6.35 80.01,6.35 82.55,6.35 85.09,6.35 2.54,7.62 5.08,7.62 53.34,8.89 55.88,8.89 69.85,8.89 72.39,8.89 74.93,8.89 77.47,8.89 80.01,8.89 82.55,8.89 2.54,10.16 5.08,10.16 26.67,11.43 29.21,11.43 31.75,11.43 34.29,11.43 53.34,11.43 55.88,11.43 5.08,12.7 35.56,13.97 38.1,13.97 40.64,13.97 55.88,13.97 35.56,16.51 38.1,16.51 40.64,16.51 25.857,18.517 35.56,19.05 38.1,19.05 40.64,19.05 22.86,20.828 19.914,23.597 36.83,24.13 39.37,24.13 41.91,24.13 36.83,26.67 39.37,26.67 41.91,26.67 4.75,27.915 76.2,27.94 81.28,27.94 15.875,29.032 36.83,29.21 39.37,29.21 41.91,29.21 41.91,31.75 76.2,33.02 81.28,33.02 86.36,33.02 21.59,34.29 24.13,34.29 26.67,34.29 19.05,36.83 21.59,36.83 24.13,36.83 26.67,36.83 29.21,36.83 16.51,38.1 86.36,39.37 4.597,48.387 4.039,52.984 24.638,69.825 23.673,70.815
GND-485: C10.1 C11.1 D1.1 D2.1 R16.1 U4.11 U4.14 U4.16 U4.20 | length 61.3
  Top Layer w0.254: R16.1 C11.1 C10.1 32.512,80.899 33.147,80.264 U4.20 v2(33.147,76.581) 34.163,75.565 43.434,75.565 44.577,76.708 U4.11 ; v2(35.192,96.152) D2.1 D1.1 ; v2(37.973,80.391) 38.227,80.137 U4.16 ; v2(40.767,77.597) U4.14
  Bottom Layer w0.254: v2(33.147,76.581) 33.147,78.359 35.179,80.391 v2(37.973,80.391) v2(40.767,77.597) ; 35.192,80.404 v2(35.192,96.152)
IIC1_SCL: R7.1 U1.92 U3.6 | length 25.6
  Top Layer w0.203: U1.92 69.513,44.621 71.806,46.914 U3.6 76.911,46.914 77.368,46.457 R7.1
IIC1_SDA: R8.1 U1.93 U3.5 | length 30.5
  Top Layer w0.203: U1.93 69.251,45.121 72.314,48.184 U3.5 77.165,48.184 78.613,46.736 78.613,41.364 R8.1
LCD_RXD: R27.2 U1.79 | length 30.3
  Top Layer w0.203: U1.79 62.209,38.121 73.762,26.568 79.07,26.568 R27.2
LCD_TXD: R26.2 U1.78 | length 28
  Top Layer w0.203: U1.78 61.921,37.621 73.584,25.959 77.546,25.959 R26.2
LED1: LED1.1 U1.88 | length 5
  Top Layer w0.203: U1.88 58.801,42.621 59.715,43.536 LED1.1
LED2: LED2.1 U1.87 | length 5
  Top Layer w0.203: U1.87 58.844,42.121 59.715,41.25 LED2.1
NetC2_2: C2.2 U1.73 | length 3.9
  Top Layer w0.203: U1.73 53.92,31.5 C2.2
NetC5_1: C5.1 U1.49 | length 5.4
  Top Layer w0.203: C5.1 37.604,37.121 U1.49
NetC12_1: C12.1 U5.8 | length 2.2
  Top Layer w0.6: C12.1 U5.8
NetC12_2: C12.2 D3.2 L1.1 U5.1 | length 11.8
  Top Layer w0.254: L1.1@16.764,66.83 D3.2 C12.2 19.558,68.326 20.32,67.564 U5.1
NetC17_1: C17.1 C18.1 F1.2 R18.2 U5.7 | length 33.5
  Top Layer w0.6: v1(21.082,62.103) R18.2
  Top Layer w1: U5.7 22.987,75.565 v1(21.971,76.581) 20.422,76.581 C18.1 C17.1 19.05,82.296 20.828,84.074 F1.2
  Bottom Layer w1: v1(21.082,62.103) 21.971,62.992 v1(21.971,76.581)
NetC19_2: C19.2 C20.2 C21.2 FB1.1 U6.0 U6.2 | length 19.4
  Top Layer w1: U6.2 U6.0 13.779,47.053 15.773,49.047 C19.2 C20.2 C21.2 FB1.1
NetC22_1: C22.1 U5.3 | length 3.2
  Top Layer w0.6: C22.1 U5.3
NetC22_2: C22.2 R22.2 | length 2.3
  Top Layer w0.6: C22.2 R22.2
NetJ8_5: J8.5 R26.1 | length 4.9
  Top Layer w0.203: R26.1 79.477,20.041 79.997,19.52 J8.5
NetJ8_6: J8.6 R27.1 | length 5
  Top Layer w0.203: J8.6 80.997,19.224 81.61,19.837 R27.1
NetJ9_2: J9.2 R29.2 | length 6
  Top Layer w0.203: R29.2 54.718,90.659 J9.2
NetJ10_1: J10.1 R30.2 | length 3.5
  Top Layer w0.6: J10.1 90.117,84.203 R30.2
NetJ13_2: J13.2 R38.2 R48.2 | length 25.5
  Top Layer w0.203: J13.2 R38.2 ; v2(14.122,30.277) R48.2
  Bottom Layer w0.203: J13.2 14.122,26.899 v2(14.122,30.277)
NetJ13_3: J13.3 R39.2 R49.2 | length 22.1
  Top Layer w0.203: J13.3 R39.2 ; v2(11.997,30.277) R49.2
  Bottom Layer w0.203: J13.3 11.997,27.313 v2(11.997,30.277)
NetJ13_4: J13.4 R36.2 R50.2 | length 18.7
  Top Layer w0.203: J13.4 R36.2 ; v2(9.872,30.277) R50.2
  Bottom Layer w0.203: J13.4 9.872,27.728 v2(9.872,30.277)
NetJ13_5: J13.5 R17.2 R51.2 | length 15.2
  Top Layer w0.203: J13.5 R17.2 ; v2(7.747,30.277) R51.2
  Bottom Layer w0.203: J13.5 7.747,28.143 v2(7.747,30.277)
NetLED1_2: LED1.2 R3.1 | length 2.8
  Top Layer w0.203: LED1.2 R3.1
NetLED2_2: LED2.2 R34.1 | length 2.8
  Top Layer w0.203: LED2.2 R34.1
NetR5_2: R5.2 U2.7 | length 5
  Top Layer w0.203: R5.2 30.734,50.165 31.623,49.276 U2.7
NetR6_1: R6.1 U2.3 | length 10.9
  Top Layer w0.203: U2.3 26.416,48.006 26.162,48.26 26.162,52.197 28.702,54.737 R6.1
NetR10_1: R10.1 U4.13 U4.18 | length 13.1
  Top Layer w0.254: U4.18 35.687,77.216 36.195,76.708 41.529,76.708 42.037,77.216 U4.13 42.037,80.391 41.758,80.67 R10.1
NetR11_2: R11.2 U4.4 | length 3.6
  Top Layer w0.254: R11.2 36.754,67.361 36.957,67.564 U4.4
NetR12_1: R12.1 U4.15 U4.17 | length 7.9
  Top Layer w0.254: U4.17 36.957,77.851 37.465,77.343 38.989,77.343 39.497,77.851 U4.15 R12.1
NetR14_2: R14.2 U4.5 U4.6 | length 5
  Top Layer w0.203: U4.5 U4.6
  Top Layer w0.254: R14.2 38.887,67.462 39.497,68.072 U4.6
NetR15_2: R15.2 U4.7 | length 3.7
  Top Layer w0.254: U4.7 40.767,67.564 41.021,67.31 R15.2
NetR18_1: R18.1 U5.2 | length 3.5
  Top Layer w0.6: R18.1 22.987,65.278 U5.2
NetR19_2: R19.2 R20.2 U5.4 | length 5.6
  Top Layer w0.6: U5.4 R20.2 R19.2
NetR21_2: R21.2 U5.6 | length 3.1
  Top Layer w0.6: U5.6 24.257,75.235 R21.2
NetR23_2: R23.2 U7.3 | length 4.2
  Top Layer w0.203: U7.3 27.986,32.279 28.401,32.694 R23.2
NetR24_1: R24.1 U7.18 | length 2.9
  Top Layer w0.203: U7.18 24.026,12.329 R24.1 R24.1@24.718,11.866
NetR25_1: R25.1 U7.16 | length 2.3
  Top Layer w0.203: R25.1@20.026,11.637 U7.16
NetR29_1: R29.1 U8.1 | length 2.5
  Top Layer w0.203: U8.1 R29.1
NetR35_1: R35.1 U9.1 | length 3.2
  Top Layer w0.203: U9.1 42.494,12.929 43.205,13.64 R35.1
NetR37_2: R37.2 U9.15 | length 6.7
  Top Layer w0.203: U9.15 50.114,10.668 50.749,11.303 50.749,13.498 R37.2
NetR40_1: R40.1 U9.4 | length 8.7
  Top Layer w0.203: U9.4 43.917,8.128 44.247,8.458 44.247,13.873 R40.1
NetR42_2: R42.2 U9.12 | length 10.3
  Top Layer w0.203: U9.12 50.292,6.858 51.415,7.981 R42.2
NetR45_1: R45.1 U9.7 | length 13.5
  Top Layer w0.203: U9.7 44.069,4.318 44.78,5.029 44.78,12.355 R45.1
NetR47_2: R47.2 U9.9 | length 14.8
  Top Layer w0.203: U9.9 49.987,3.048 51.943,5.004 51.943,13.36 R47.2
NRST: C1.2 R1.1 U1.14 | length 12.4
  Top Layer w0.203: C1.2 48.42,53.434 U1.14
  Top Layer w0.254: C1.2 R1.1
OSC_IN: C3.1 U1.12 Y1.2 | length 13.5
  Top Layer w0.203: U1.12 49.42,55.389 52.019,57.988 Y1.2 53.086,60.401 C3.1
OSC_OUT: C4.1 U1.13 Y1.1 | length 11.6
  Top Layer w0.203: C4.1 48.844,60.528 48.006,59.69 Y1.1 48.006,56.134 48.92,55.22 U1.13
RFID_RXD: J12.2 U1.83 | length 17.2
  Top Layer w0.203: U1.83 61.911,40.121 68.275,33.757 J12.2
RFID_TXD: J12.1 U1.80 | length 17.7
  Top Layer w0.203: U1.80 62.572,38.621 69.977,31.217 J12.1
RS485_A: D1.2 J7.3 R9.1 R10.2 R13.2 ZD1.1 | length 36.8
  Top Layer w0.254: ZD1.1 24.497,93.867 24.003,94.361 J7.3 26.06,98.704 30.099,98.704 34.671,94.132 39.052,94.132 41.758,91.427 R10.2 R9.1
RS485_B: D2.2 J7.4 R12.2 R13.1 R16.2 ZD1.2 | length 26.5
  Top Layer w0.254: J7.4 29.083,91.454 ZD1.2 37.25,91.44 39.497,89.193 R13.1 ; R16.2 R13.1 ; R12.2 R13.1
STEP_MOTOR1_CP: J4.2 U1.35 | length 71
  Top Layer w0.203: J4.2 7.747,73.406 7.747,43.561 9.144,42.164 29.337,42.164 31.294,44.121 U1.35
STEP_MOTOR1_DIR: J4.3 U1.34 | length 72.8
  Top Layer w0.203: J4.3 8.382,75.311 8.382,43.815 9.525,42.672 29.21,42.672 31.159,44.621 U1.34
STEP_MOTOR1_EN: J4.4 U1.33 | length 74.6
  Top Layer w0.203: J4.4 8.89,77.343 8.89,44.196 9.906,43.18 28.829,43.18 30.77,45.121 U1.33
STEP_MOTOR2_CP: J5.2 U1.42 | length 51.6
  Top Layer w0.203: J5.2 5.842,54.483 5.842,42.799 8.02,40.621 U1.42
STEP_MOTOR2_DIR: J5.3 U1.41 | length 53.4
  Top Layer w0.203: J5.3 6.477,56.388 6.477,43.053 8.409,41.121 U1.41
STEP_MOTOR2_EN: J5.4 U1.40 | length 55.2
  Top Layer w0.203: J5.4 7.112,58.293 7.112,43.307 8.798,41.621 U1.40
STEP_MOTOR3_CP: J6.2 U1.45 | length 38.9
  Top Layer w0.203: J6.2 5.588,36.576 8.133,39.121 U1.45
STEP_MOTOR3_DIR: J6.3 U1.44 | length 38
  Top Layer w0.203: J6.3 7.239,39.116 7.744,39.621 U1.44
STEP_MOTOR3_EN: J6.4 U1.43 | length 38.4
  Top Layer w0.203: J6.4 6.223,41.656 7.758,40.121 U1.43
SWCLK: J2.3 U1.76 | length 37.3
  Top Layer w0.203: U1.76 57.12,33.304 57.912,32.512 57.912,18.923 68.097,8.738 J2.3
SWDIO: J2.2 U1.72 | length 35.6
  Top Layer w0.203: U1.72 53.42,22.119 65.562,9.978 J2.2@65.562,3.886
UART1_RX: J3.1 U1.69 | length 34
  Top Layer w0.203: U1.69 51.92,22.679 60.274,14.326 J3.1
UART1_TX: J3.2 U1.68 | length 33.2
  Top Layer w0.203: U1.68 51.42,22.316 57.734,16.002 J3.2
USB_DM: J10.2 U1.70 | length 78.3
  Top Layer w0.203: v2(52.197,36.068) 52.42,35.845 U1.70
  Bottom Layer w0.203: v2(52.197,36.068) 52.832,36.068 59.817,43.053 59.817,75.311 69.088,84.582 85.979,84.582 87.577,86.18 J10.2
USB_DP: J10.3 U1.71 | length 76.1
  Top Layer w0.203: U1.71 v2(52.92,37.338)
  Bottom Layer w0.203: v2(52.92,37.338) 59.182,43.6 59.182,75.565 68.834,85.217 84.709,85.217 85.545,86.053 J10.3
V485: C10.2 C11.2 R9.2 U4.12 U4.19 | length 22.1
  Top Layer w0.254: C11.2 C10.2 34.798,80.899 34.417,80.518 U4.19 34.417,76.708 35.052,76.073 42.545,76.073 43.307,76.835 U4.12 43.307,79.756 44.094,80.543 R9.2
WIFI_EN: R23.1 U1.46 U7.1 | length 15.6
  Top Layer w0.203: U7.1@31.982,29.979 R23.1 31.982,35.615 34.989,38.621 U1.46
WIFI_RXD: U1.48 U7.22 | length 30.3
  Top Layer w0.203: U7.22 32.026,18.564 34.265,20.803 34.265,36.427 35.458,37.621 U1.48
WIFI_TXD: U1.47 U7.21 | length 31.8
  Top Layer w0.203: U7.21 30.026,17.25 33.807,21.031 33.807,36.724 35.204,38.121 U1.47
pads on no net: J8.4 J8.7 R41.2 R43.2 R44.2 R46.2 U1.0 U1.1 U1.2 U1.3 U1.5 U1.7 U1.8 U1.9 U1.15 U1.16 U1.17 U1.18 U1.23 U1.36 U1.38 U1.39 U1.51 U1.52 U1.55 U1.56 U1.57 U1.58 U1.66 U1.67 U1.77 U1.81 U1.82 U1.84 U1.85 U1.86 U1.89 U1.90 U1.91 U1.95 U1.96 U1.97 U1.98 U3.1 U3.2 U3.3 U3.7 U7.2 U7.4 U7.5 U7.6 U7.7 U7.9 U7.10 U7.11 U7.12 U7.13 U7.14 U7.17 U7.19 U7.20

## Polygon pours and split planes (outlines as drawn)
GND on Bottom Layer "Top Layer-No Net" (solid, remove dead copper, pour order 1000): 0,0 0.051,-0.051 100.228,-0.051 100.228,99.771 99.924,100.076 99.847,100 -0.025,100
GND on Top Layer "Top Layer-No Net" (solid, remove dead copper, pour order 1001): 0,0 0.051,-0.051 100.228,-0.051 100.228,99.771 99.924,100.076 99.847,100 -0.025,100

## Keep-outs
Keep-Out Layer:
  circle w0.127: c3,3 r1.5
  circle w0.127: c97,3 r1.5
  circle w0.127: c97,97 r1.5
  circle w0.127: c3,97 r1.5
  lines w0.127: 0,2 ccw(c2,2) 2,0 98,0 ccw(c98,2) 100,2 100,98 ccw(c98,98) 98,100 2,100 ccw(c2,98) 0,98 0,2

## Other copper
Top Layer:
  rectangle net +5V: 9.779,59.182 12.192,69.723
  rectangle net NetC12_2: 15.875,66.294 21.971,68.834
  rectangle net NetC12_2: 15.748,66.294 20.193,71.628
  region net GND: 17.653,74.422 15.748,74.422 15.748,83.439 12.954,86.233 12.954,88.011 13.589,88.646 14.859,88.646 17.653,85.598
  pour cut-out: 10.818,69.777 10.818,63.805 16.789,63.805 16.818,63.777 16.818,69.777
Bottom Layer:
  region net GND: 18.415,97.663 13.081,92.329 13.081,87.249 13.589,86.614 14.351,86.614 14.986,87.249 14.986,91.186 19.939,96.139 19.939,97.282 19.431,97.79

## Silkscreen, mask and mechanical layers (free items; w line width, h text height)
Top Overlay:
  text "SW" at 46.965,97.434 h1.52
  text "B" at 71.12,93.904 h1 r90
  text "A" at 73.101,93.878 h1 r90
  text "C" at 69.037,93.853 h1 r90
  text "G" at 51.486,93.65 h1 r90
  text "24V" at 57.785,93.37 h1
  text "G" at 66.269,93.37 h1
  text "24V" at 74.193,93.37 h1
  text "G" at 64.262,93.345 h1
  text "OUT" at 53.442,93.269 h1
  text "B" at 31.217,93.015 h1
  text "A" at 21.971,92.964 h1
  text "GND" at 15.748,92.761 h1
  text "24V" at 11.125,92.507 h1
  text "ENCODER" at 64.105,82.266 h1.52
  text "YarnControl_Mainboard_v1.0" at 62.662,66.497 h1
  text "2018.10.31" at 70.18,64.922 h1
  text "+5V" at 73.558,35.636 h1
  text "RXD" at 73.558,33.172 h1
  text "TXD" at 73.558,30.632 h1
  text "RFID" at 74.727,28.118 h1.52
  text "LCD" at 77.876,9.804 h1.52
  text "GND" at 55.905,6.071 h1 r90
  text "TX" at 58.479,6.071 h1 r90
  text "RX" at 61.053,6.071 h1 r90
  text "3.3" at 63.627,6.071 h1 r90
  text "IO" at 66.201,6.071 h1 r90
  text "CLK" at 68.775,6.071 h1 r90
  text "GND" at 71.349,6.071 h1 r90

## Text inside footprints (layer, text, board x,y; h text height)
C14: Top Overlay "+" at 22.682,90.043 h1.27 r180; Top Overlay "+" at 19.71,89.713 h1.27 r180; Bottom Overlay "+" at 18.788,86.201 h1.02 r180
J4: Top Overlay "2" at 5.141,77.852 h1.1 r90; Top Overlay "1" at 5.181,75.492 h1.1 r90; Top Overlay "3" at 5.141,80.392 h1.1 r90; Top Overlay "6" at 5.141,88.012 h1.1 r90; Top Overlay "4" at 5.181,83.112 h1.1 r90; Top Overlay "5" at 5.141,85.472 h1.1 r90
J5: Top Overlay "2" at 5.141,57.024 h1.1 r90; Top Overlay "1" at 5.181,54.664 h1.1 r90; Top Overlay "3" at 5.141,59.564 h1.1 r90; Top Overlay "6" at 5.141,67.184 h1.1 r90; Top Overlay "4" at 5.181,62.284 h1.1 r90; Top Overlay "5" at 5.141,64.644 h1.1 r90
J6: Top Overlay "2" at 5.141,36.196 h1.1 r90; Top Overlay "1" at 5.181,33.836 h1.1 r90; Top Overlay "3" at 5.141,38.736 h1.1 r90; Top Overlay "6" at 5.141,46.356 h1.1 r90; Top Overlay "4" at 5.181,41.456 h1.1 r90; Top Overlay "5" at 5.141,43.816 h1.1 r90
J9: Top Overlay "3" at 53.061,98.603 h1.1 r180; Top Overlay "1" at 56.918,98.622 h1.1 r180
J13: Top Overlay "2" at 5.141,15.317 h1.1 r90; Top Overlay "1" at 5.181,12.957 h1.1 r90; Top Overlay "3" at 5.141,17.857 h1.1 r90; Top Overlay "6" at 5.141,25.477 h1.1 r90; Top Overlay "4" at 5.181,20.577 h1.1 r90; Top Overlay "5" at 5.141,22.937 h1.1 r90